# Altium PCB PCB1.PcbDoc (part 2 of 2)
Units mil, origin at the board's own origin, x right, y up, seen from the top; angles counter-clockwise.
Board outline 1500 x 1500 mil, 2 copper layers (Top Layer, Bottom Layer); 49 components, 35 nets, 276 pads, 49 vias.
Unrouted connection lines stored in the file: 2.
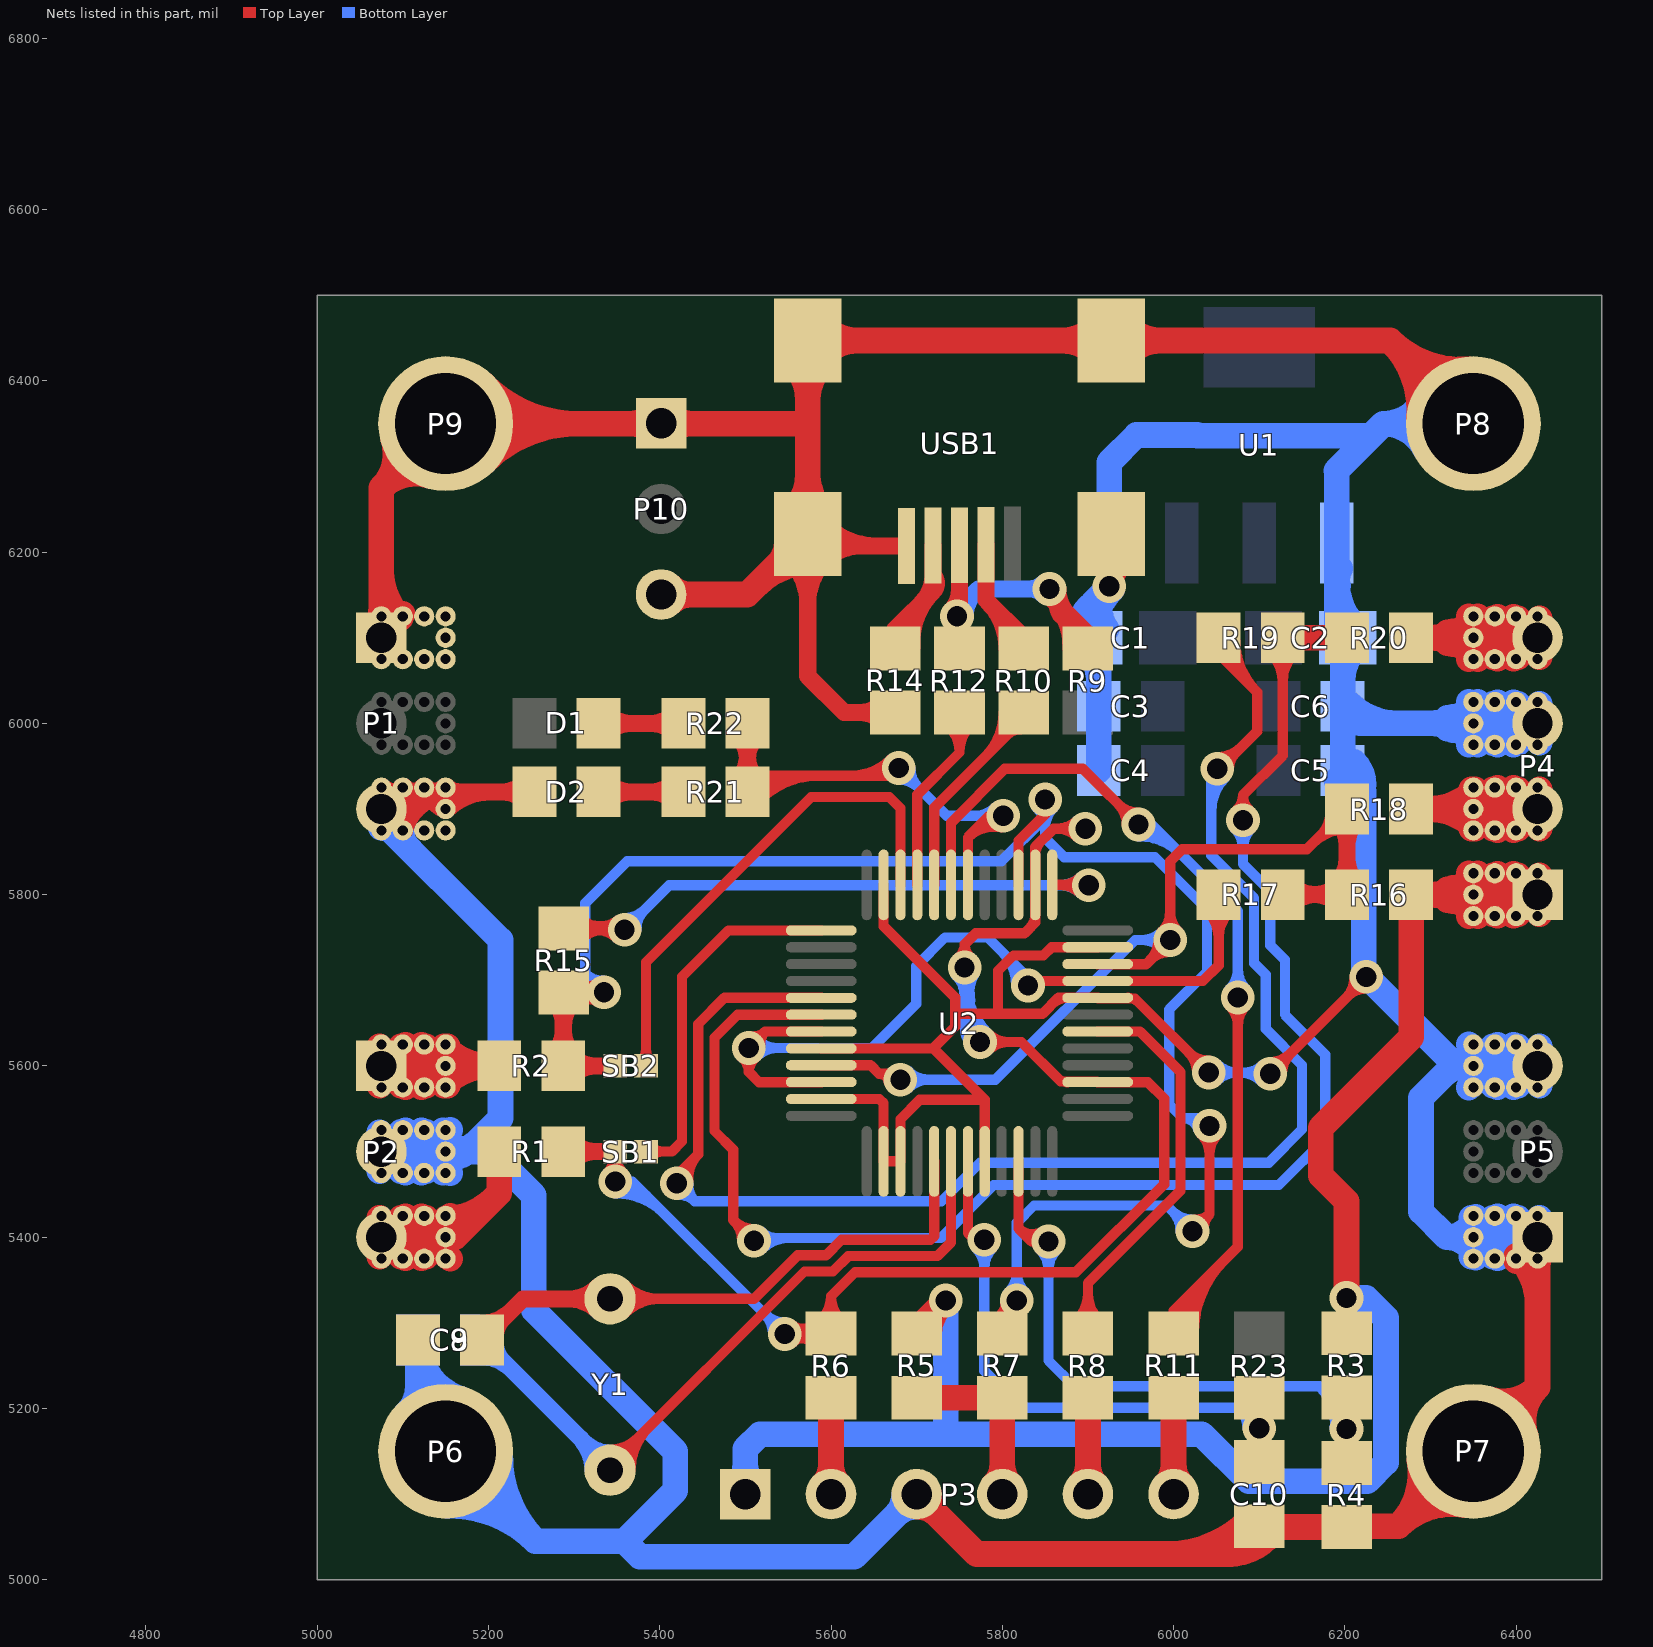
[diagram p2: the nets of this part, all layers, seen from the top]

## Via types
v1: diameter 39.37, hole 23.62, Top Layer to Bottom Layer, tented both sides, 47 vias
v2: diameter 47.24, hole 39.37, Top Layer to Bottom Layer, tented both sides, 2 vias

## Nets (pads, with @x,y where several pads share a name; then routed paths per layer and width w, separated by ;. In a path a pad name is that pad's centre, name@x,y a point inside that pad or via, vN(x,y) a via of type N, cw(c..) or ccw(c..) an arc to the next point about the centre after c; other vN are vias at no path point) (continued)
GND: C1.2 C2.2 C3.1 C4.1 C5.1 C6.1 C8.2 C9.2 C10.2 D2.2 P1.1 P1.3 P2.2 P3.3 P4.3 P5.1 P5.3 P6.1 P7.1 P8.1 P9.1 P10.1 P10.3 pad.1@5075,5475 pad.1@5075,5525 pad.1@5075,5875 pad.1@5075,5925 pad.1@5075,6075 pad.1@5075,6125 pad.1@5100,5475 pad.1@5100,5525 pad.1@5100,5875 pad.1@5100,5925 pad.1@5100,6075 pad.1@5100,6125 pad.1@5125,5475 pad.1@5125,5525 pad.1@5125,5875 pad.1@5125,5925 pad.1@5125,6075 pad.1@5125,6125 pad.1@5150,5475 pad.1@5150,5500 pad.1@5150,5525 pad.1@5150,5875 pad.1@5150,5900 pad.1@5150,5925 pad.1@5150,6075 pad.1@5150,6100 pad.1@5150,6125 pad.1@6350,5375 pad.1@6350,5400 pad.1@6350,5425 pad.1@6350,5575 pad.1@6350,5600 pad.1@6350,5625 pad.1@6350,5975 pad.1@6350,6000 pad.1@6350,6025 pad.1@6375,5375 pad.1@6375,5425 pad.1@6375,5575 pad.1@6375,5625 pad.1@6375,5975 pad.1@6375,6025 pad.1@6400,5375 pad.1@6400,5425 pad.1@6400,5575 pad.1@6400,5625 pad.1@6400,5975 pad.1@6400,6025 pad.1@6425,5375 pad.1@6425,5425 pad.1@6425,5575 pad.1@6425,5625 pad.1@6425,5975 pad.1@6425,6025 R4.2 R14.2 U1.1 U2.2 U2.3 U2.8 U2.20 U2.23 U2.35 U2.44 U2.47 USB1.5 USB1.6 USB1.7 USB1.8 USB1.9 | length 18255.1
  Top Layer w12: U2.47@5588.58,5561.42 5656.42,5561.42 5661.42,5556.42 U2.2@5661.42,5488.58 U2.3@5681.1,5488.58 5681.1,5537.88 5703.64,5560.42 5779.53,5560.42 ; U2.44@5588.58,5620.47 5719.47,5620.47 ; U2.35@5661.42,5811.42 5661.42,5763.11 5745,5679.53 5745,5661 ; U2.8@5779.53,5488.58 5779.53,5560.42 ; 5858.3,5672.29 cw(c5875.98,5654.61) U2.20@5875.98,5679.62 ; U2.23@5911.42,5738.58 5857.58,5738.58 5848,5729 5813,5729 5795,5711 5795,5661 ; U2.20@5946.85,5679.62 cw(c5946.85,5662.83) 5958.73,5674.7 ; v1@6027.31,5592.43 ccw(c5994.28,5592.43) 6017.64,5615.79 ccw(c6041,5639.15) v1@6041,5606.11 ; v1(6041,5592.43) 5954.68,5678.75 5912.2,5678.75 U2.20@5911.42,5679.53 5865.53,5679.53 5847,5661 5795,5661 ; v1(6113,5591) 6225,5703 v1(6225,5704) ; v1@6113,5604.69 ccw(c6113,5637.72) 6136.36,5614.36 ccw(c6159.72,5591) v1@6126.69,5591 ; 6200.93,5678.93 ccw(c6175.86,5704) v1@6211.31,5704 ; 6203.35,5681.35 cw(c6225,5659.69) v1@6225,5690.32 ; 5719.47,5620.47 5745,5646 5745,5661 ; 5719.47,5620.47 5779.53,5560.42 ; 5745,5661 5795,5661
  Top Layer w20: P1.3@5074.67,5900.33 cw(c5122.14,5852.86) pad.1@5122.14,5920 ; P1.3@5075,5900 5095,5920 D2.2@5253.6,5920 ; P1.3@5083.95,5905.96 ccw(c5067.59,5932.95) pad.1@5098.24,5925.43 ; P1.3@5088.81,5886.19 cw(c5170.43,5804.57) 5170.43,5920 ; pad.1@5097.34,5920 cw(c5097.34,5847.34) pad.1@5148.72,5898.72 ; P1.3@5099.84,5893 ccw(c5072.4,5937.45) pad.1@5123.24,5925.42 ; pad.1@5101.28,5926.28 ccw(c5116.44,5941.44) pad.1@5116.44,5920 ; pad.1@5101.57,5925.91 ccw(c5121.67,5937.51) 5115.66,5915.09 ; pad.1@5101.75,5874.53 cw(c5156.39,5859.89) 5128.11,5908.88 ; pad.1@5108.56,5920 ccw(c5108.56,5941.44) pad.1@5123.72,5926.28 ; 5112.3,5917.36 ccw(c5107.55,5935.07) pad.1@5123.43,5925.91 ; pad.1@5126.28,5926.28 ccw(c5141.44,5941.44) pad.1@5141.44,5920 ; pad.1@5126.76,5925.41 ccw(c5163.53,5933.97) pad.1@5143.58,5901.92 ; pad.1@5133.56,5920 ccw(c5133.56,5941.44) pad.1@5148.72,5926.28 ; 5136.06,5910.92 ccw(c5124.51,5932.97) pad.1@5148.27,5925.54 ; pad.1@5151.28,5898.72 cw(c5202.66,5847.34) 5202.66,5920 ; pad.1@5151.32,5926.24 ccw(c5166.41,5940.46) 5168.27,5919.81 ; pad.1@5151.28,5926.28 ccw(c5166.44,5941.44) 5166.44,5920 ; D2.2@5242.57,5908.98 ccw(c5215.96,5882.36) 5215.96,5920 ccw(c5215.96,5957.64) D2.2@5242.57,5931.02 ; USB1.6@5552.07,6190.39 cw(c5501.93,6140.25) 5572.83,6140.25 cw(c5643.74,6140.25) 5593.6,6190.39 cw(c5633.7,6150.29) 5633.7,6207 ; USB1.6@5572.83,6221 5572.83,6055.17 5615.4,6012.6 R14.2@5675,6012.6 ; USB1.6@5586.83,6207 USB1.5@5688,6207 ; USB1.6@5593.6,6231.93 ccw(c5653.78,6292.1) 5653.78,6207 ; R14.2@5660.04,6001.57 ccw(c5633.42,5974.96) 5633.42,6012.6 ccw(c5633.42,6050.24) R14.2@5660.04,6023.62 ; pad.1@5076.28,5926.28 ccw(c5091.44,5941.44) 5091.44,5920 cw(c5091.44,5941.44) pad.1@5076.28,5926.28
  Top Layer w30: P1.1@5064.73,6110.27 ccw(c5039.93,6135.07) 5075,6135.07 ccw(c5110.07,6135.07) P1.1@5085.27,6110.27 ; P1.1@5075,6089.65 cw(c5117.75,6089.65) pad.1@5098.57,6127.85 ; 5075,6177.66 ccw(c5152.66,6177.66) pad.1@5097.75,6122.75 ; P9.1@5089.05,6331.35 cw(c5035.14,6314.86) 5075,6275 ; pad.1@5099.57,6128.16 ccw(c5103.42,6100) P1.1@5075,6100 pad.1@5075,6125 5075,6275 ; P9.1@5131.35,6289.05 ccw(c5114.86,6235.14) 5075,6275 ; P9.1@5173.86,6326.14 cw(c5231.46,6268.54) 5231.46,6350 cw(c5231.46,6431.46) P9.1@5173.86,6373.86 ; P9.1@5195.07,6304.93 cw(c5303.88,6196.12) 5303.88,6350 cw(c5303.88,6503.88) P9.1@5195.07,6395.07 ; 5365.55,6350 ccw(c5365.55,6386.42) P10.1@5391.3,6360.67 ; 5367.45,6350 cw(c5367.45,6316.27) P10.1@5391.3,6340.12 ; P10.3@5401.57,6150.39 5502.23,6150.39 USB1.6@5572.83,6221 5573,6221.17 5573,6350 ; P10.3@5411.85,6140.12 cw(c5436.65,6115.32) 5436.65,6150.39 cw(c5436.65,6185.47) P10.3@5411.85,6160.67 ; P10.1@5411.85,6340.12 cw(c5435.7,6316.27) 5435.7,6350 ; P10.1@5411.85,6360.67 ccw(c5437.6,6386.42) 5437.6,6350 ; 5514.43,6162.6 cw(c5572.83,6104.19) USB1.6@5572.83,6186.79 ; USB1.6@5538.19,6186.36 ccw(c5513.39,6211.16) USB1.6@5548.46,6211.16 ; USB1.6@5555.6,6248.07 ccw(c5513.6,6290.08) 5573,6290.08 ; USB1.7@5555.77,6419.93 cw(c5514.17,6378.32) 5573,6378.32 cw(c5631.83,6378.32) USB1.7@5590.23,6419.93 ; 5573,6289.28 ccw(c5631.27,6289.28) USB1.6@5590.07,6248.07 ; USB1.7@5590.23,6429.77 cw(c5631.83,6388.17) 5631.83,6447 cw(c5631.83,6505.83) USB1.7@5590.23,6464.23 ; P3.3@5700,5085.47 cw(c5700,5050.4) 5724.8,5075.2 cw(c5749.6,5100) P3.3@5714.53,5100 ; P3.3@5700,5100 5770,5030 6067.4,5030 C10.2@6100,5062.6 6101,5061.6 R4.2@6202,5061.6 6203,5062.6 6262.6,5062.6 ; USB1.8@5910.1,6429.77 ccw(c5868.5,6388.17) 5868.5,6447 ccw(c5868.5,6505.83) USB1.8@5910.1,6464.23 ; USB1.9@5912.46,6191.72 cw(c5890.11,6162.17) v1@5927.17,6162.17 ; v1(5925,6160) v1@5927.17,6162.17 ; USB1.9@5927.33,6221.17 USB1.9@5927.17,6221 v1@5927.17,6162.17 ; USB1.9@5941.87,6191.72 ccw(c5964.22,6162.17) v1@5927.17,6162.17 ; USB1.8@5944.56,6429.77 cw(c5986.17,6388.17) 5986.17,6447 cw(c5986.17,6505.83) USB1.8@5944.56,6464.23 ; 5991.8,5030 ccw(c5991.8,5166.87) C10.2@6088.57,5070.09 ; 6064.22,5030 ccw(c6064.22,5094.44) C10.2@6109.79,5048.87 ; C10.2@6075.2,5037.8 ccw(c6050.4,5062.6) C10.2@6085.47,5062.6 ; C10.2@6111.43,5070.09 ccw(c6131.92,5090.58) 6131.92,5061.6 ; R4.2@6213.43,5054.11 cw(c6233.92,5033.62) 6233.92,5062.6 ; P8.1@6286.49,6355.38 ccw(c6171.17,6365.16) 6253,6447 ; P7.1@6287.15,5139.41 cw(c6200.4,5124.8) 6262.6,5062.6 ; P7.1@6339.41,5087.15 ccw(c6324.8,5000.4) 6262.6,5062.6 ; P8.1@6344.62,6413.51 cw(c6334.84,6528.83) 6253,6447 ; P8.1@6350,6350 6253,6447 ; P7.1@6368.65,5210.95 ccw(c6385.14,5264.86) 6425,5225 ; pad.1@6400.43,5371.84 ccw(c6396.58,5400) P5.1@6425,5400 pad.1@6425,5375 6425,5225 ; pad.1@6400.43,5378.16 cw(c6396.58,5350) 6425,5350 ; pad.1@6402.25,5377.25 cw(c6347.34,5322.34) 6425,5322.34 ; P7.1@6410.95,5168.65 cw(c6464.86,5185.14) 6425,5225 ; P5.1@6414.73,5389.73 cw(c6389.93,5364.93) 6425,5364.93 cw(c6460.07,5364.93) P5.1@6435.27,5389.73 ; 5075,6275 P9.1@5150,6350 5573,6350 ; 5573,6350 USB1.7@5573,6447 USB1.8@5927.33,6447 6253,6447 ; 6262.6,5062.6 P7.1@6350,5150 6425,5225
  Bottom Layer w12: v1(6041,5592.43) 6101.57,5592.43 6103,5591 v1(6113,5591) ; v1@6050.68,5582.75 cw(c6074.04,5559.39) 6074.04,5592.43 cw(c6074.04,5625.47) v1@6050.68,5602.11 ; 6076.51,5592.43 cw(c6076.51,5554.51) v1@6103.32,5581.32 ; 6083.41,5592.43 ccw(c6083.41,5620.59) v1@6103.32,5600.68
  Bottom Layer w30: pad.1@5072.75,5477.25 cw(c5127.66,5422.34) 5127.66,5500 cw(c5127.66,5577.66) pad.1@5072.75,5522.75 ; pad.1@5074.17,5878.08 cw(c5078.48,5862) P1.3@5086.81,5876.42 ; pad.1@5075,5878.19 cw(c5075,5859.33) 5088.33,5872.67 ; P1.3@5075,5900 5075,5886 5214,5747 5214,5539 5175,5500 ; pad.1@5081.54,5879.46 ccw(c5100,5897.91) pad.1@5100,5871.81 ; P2.2@5085.27,5489.73 cw(c5110.07,5464.93) 5110.07,5500 cw(c5110.07,5535.07) P2.2@5085.27,5510.27 ; P1.3@5089.53,5900 ccw(c5158.4,5900) 5109.7,5851.3 ; pad.1@5096.81,5875 ccw(c5122.91,5875) 5104.46,5856.54 ; pad.1@5097.66,5477.17 cw(c5150,5428.6) pad.1@5150,5500 ; pad.1@5097.66,5522.83 ccw(c5150,5571.4) pad.1@5150,5500 ; pad.1@5103.16,5475.43 ccw(c5075,5471.58) P2.2@5075,5500 ; pad.1@5103.16,5524.57 cw(c5075,5528.42) P2.2@5075,5500 ; P6.1@5104.93,5195.07 ccw(c5074.34,5225.66) 5117.6,5225.66 ; C9.2@5112.3,5266.89 cw(c5097.78,5241.74) 5125.84,5249.26 ; 5117.6,5239.43 ccw(c5177.39,5239.43) P6.1@5159.88,5182.26 ; 5119.87,5493.57 ccw(c5131.31,5533.63) pad.1@5151.55,5497.21 ; 5119.87,5506.43 cw(c5131.31,5466.37) pad.1@5151.55,5502.79 ; pad.1@5121.84,5475.43 cw(c5150,5471.58) pad.1@5150,5500 ; pad.1@5121.84,5524.57 ccw(c5150,5528.42) pad.1@5150,5500 ; pad.1@5127.34,5477.17 ccw(c5075,5428.6) P2.2@5075,5500 ; pad.1@5127.34,5522.83 cw(c5075,5571.4) P2.2@5075,5500 ; pad.1@5146.84,5475.43 cw(c5175,5471.58) 5175,5500 ; pad.1@5146.84,5524.57 ccw(c5175,5528.42) 5175,5500 ; pad.1@5146.94,5499.12 cw(c5170.5,5505.92) pad.1@5155.25,5525.12 ; pad.1@5146.94,5500.88 ccw(c5170.5,5494.08) pad.1@5155.25,5474.88 ; pad.1@5148.23,5497.35 ccw(c5160,5515) 5175,5500 ; pad.1@5148.67,5497.1 ccw(c5157.87,5517.08) 5165.56,5496.48 ; pad.1@5148.67,5502.9 cw(c5157.87,5482.92) 5165.56,5503.52 ; pad.1@5150,5496.81 ccw(c5150,5549.47) 5187.23,5512.23 ; pad.1@5151.26,5483.6 ccw(c5131.26,5494.42) pad.1@5153.06,5500.91 ; pad.1@5151.26,5516.4 cw(c5131.26,5505.58) pad.1@5153.06,5499.09 ; P6.1@5151.63,5086.28 cw(c5155.24,4945.25) 5254.99,5045.01 ; pad.1@5152.25,5477.25 ccw(c5097.34,5422.34) 5097.34,5500 ccw(c5097.34,5577.66) pad.1@5152.25,5522.75 ; P6.1@5168.67,5210.95 cw(c5189.82,5280) C9.2@5117.6,5280 5117.6,5182.4 P6.1@5150,5150 5255,5045 ; P6.1@5213.72,5148.37 ccw(c5354.75,5144.76) 5254.99,5045.01 ; P3.3@5685.47,5100 cw(c5650.4,5100) 5675.2,5075.2 cw(c5700,5050.4) P3.3@5700,5085.47 ; P3.3@5700,5100 5627,5027 5377,5027 5359,5045 ; C1.2@5895.03,6111.66 ccw(c5866.87,6139.82) 5906.69,6139.82 ccw(c5946.52,6139.82) C1.2@5918.36,6111.66 ; C1.2@5897,6088.34 cw(c5859.33,6050.67) 5912.6,6050.67 ; C1.2@5897.95,6091.77 cw(c5924.49,6112.16) 5900.83,6135.83 ; C1.2@5906.69,6104.49 cw(c5980.51,6104.49) v1@5928.31,6156.69 ; C4.1@5912.6,5945 C3.1@5912.6,6020 5912.6,6094.09 C1.2@5906.69,6100 5906.69,6141.69 v1(5925,6160) ; C1.2@5921.74,6110.05 cw(c5951.83,6133.17) v1(5925,6160) ; C5.1@6189.91,5933.57 cw(c6112.45,5856.11) 6222,5856.11 ; U1.1@6190.55,6165.87 ccw(c6267.21,6165.87) C2.2@6213,6111.66 ; 6191.94,6160.68 cw(c6217.72,6167.58) U1.1@6194.61,6180.93 ; 6197.4,6050.67 cw(c6250.67,6050.67) C2.2@6213,6088.34 ; C6.1@6204.89,6023.55 ccw(c6261.75,6080.41) 6261.75,6000 ; C5.1@6211.13,5954.79 cw(c6184.87,5928.54) C5.1@6222,5928.54 ; P8.1@6293.45,6320.59 ccw(c6245.01,6295.39) 6245.01,6350 ; P8.1@6293.45,6379.41 cw(c6245.01,6404.61) 6245.01,6350 ; 6314.47,5588.47 cw(c6350,5552.95) pad.1@6350,5603.19 ; 6319.87,5993.57 ccw(c6331.31,6033.63) pad.1@6351.55,5997.21 ; 6319.87,6006.43 cw(c6331.31,5966.37) pad.1@6351.55,6002.79 ; 6321.3,5608.7 ccw(c6350,5637.4) pad.1@6350,5596.81 ; pad.1@6344.75,5574.88 ccw(c6329.5,5594.08) pad.1@6353.06,5600.88 ; pad.1@6344.75,5625.12 cw(c6329.5,5605.92) pad.1@6353.06,5599.12 ; pad.1@6344.75,5974.88 ccw(c6329.5,5994.08) pad.1@6353.06,6000.88 ; pad.1@6344.75,6025.12 cw(c6329.5,6005.92) pad.1@6353.06,5999.12 ; pad.1@6346.94,5999.12 cw(c6370.5,6005.92) pad.1@6355.25,6025.12 ; pad.1@6346.94,6000.88 ccw(c6370.5,5994.08) pad.1@6355.25,5974.88 ; pad.1@6347.75,5377.25 cw(c6402.66,5322.34) 6402.66,5400 cw(c6402.66,5477.66) pad.1@6347.75,5422.75 ; pad.1@6347.75,5577.25 cw(c6402.66,5522.34) 6402.66,5600 cw(c6402.66,5677.66) pad.1@6347.75,5622.75 ; pad.1@6347.75,5977.25 cw(c6402.66,5922.34) 6402.66,6000 cw(c6402.66,6077.66) pad.1@6347.75,6022.75 ; pad.1@6348.45,5597.21 ccw(c6368.69,5633.63) 6380.13,5593.57 ; pad.1@6348.45,5602.79 cw(c6368.69,5566.37) 6380.13,5606.43 ; pad.1@6348.45,5997.21 ccw(c6368.69,6033.63) 6380.13,5993.57 ; pad.1@6348.45,6002.79 cw(c6368.69,5966.37) 6380.13,6006.43 ; P8.1@6350,6350 6245,6350 ; pad.1@6351.13,5597.02 cw(c6343.42,5617.42) 6328,5602 ; pad.1@6352.2,5602.31 ccw(c6340.26,5589.74) 6328,5602 ; pad.1@6352.25,5977.25 ccw(c6297.34,5922.34) 6297.34,6000 ccw(c6297.34,6077.66) pad.1@6352.25,6022.75 ; pad.1@6353,5376.08 ccw(c6319,5363.88) 6319,5400 ; pad.1@6353,5423.92 cw(c6319,5436.12) 6319,5400 ; pad.1@6372.66,5377.17 cw(c6425,5328.6) P5.1@6425,5400 ; pad.1@6372.66,5422.83 ccw(c6425,5471.4) P5.1@6425,5400 ; pad.1@6372.66,5577.17 cw(c6425,5528.6) P5.3@6425,5600 ; pad.1@6372.66,5622.83 ccw(c6425,5671.4) P5.3@6425,5600 ; pad.1@6372.66,5977.17 cw(c6425,5928.6) P4.3@6425,6000 ; pad.1@6372.66,6022.83 ccw(c6425,6071.4) P4.3@6425,6000 ; pad.1@6378.16,5375.43 ccw(c6350,5371.58) pad.1@6350,5400 ; pad.1@6378.16,5424.57 cw(c6350,5428.42) pad.1@6350,5400 ; pad.1@6378.16,5575.43 ccw(c6350,5571.58) pad.1@6350,5600 ; pad.1@6378.16,5624.57 cw(c6350,5628.42) pad.1@6350,5600 ; pad.1@6378.16,5975.43 ccw(c6350,5971.58) pad.1@6350,6000 ; pad.1@6378.16,6024.57 cw(c6350,6028.42) pad.1@6350,6000 ; pad.1@6396.84,5375.43 cw(c6425,5371.58) P5.1@6425,5400 ; pad.1@6396.84,5424.57 ccw(c6425,5428.42) P5.1@6425,5400 ; pad.1@6396.84,5575.43 cw(c6425,5571.58) P5.3@6425,5600 ; pad.1@6396.84,5624.57 ccw(c6425,5628.42) P5.3@6425,5600 ; pad.1@6396.84,5975.43 cw(c6425,5971.58) P4.3@6425,6000 ; pad.1@6396.84,6024.57 ccw(c6425,6028.42) P4.3@6425,6000 ; pad.1@6402.34,5377.17 ccw(c6350,5328.6) pad.1@6350,5400 ; pad.1@6402.34,5422.83 cw(c6350,5471.4) pad.1@6350,5400 ; pad.1@6402.34,5577.17 ccw(c6350,5528.6) pad.1@6350,5600 ; pad.1@6402.34,5622.83 cw(c6350,5671.4) pad.1@6350,5600 ; pad.1@6402.34,5977.17 ccw(c6350,5928.6) pad.1@6350,6000 ; pad.1@6402.34,6022.83 cw(c6350,6071.4) pad.1@6350,6000 ; P5.1@6414.73,5389.73 ccw(c6389.93,5364.93) 6389.93,5400 ccw(c6389.93,5435.07) P5.1@6414.73,5410.27 ; P5.3@6414.73,5589.73 ccw(c6389.93,5564.93) 6389.93,5600 ccw(c6389.93,5635.07) P5.3@6414.73,5610.27 ; P4.3@6414.73,5989.73 ccw(c6389.93,5964.93) 6389.93,6000 ccw(c6389.93,6035.07) P4.3@6414.73,6010.27 ; pad.1@6427.25,5377.25 ccw(c6372.34,5322.34) 6372.34,5400 ccw(c6372.34,5477.66) pad.1@6427.25,5422.75 ; pad.1@6427.25,5577.25 ccw(c6372.34,5522.34) 6372.34,5600 ccw(c6372.34,5677.66) pad.1@6427.25,5622.75 ; pad.1@6427.25,5977.25 ccw(c6372.34,5922.34) 6372.34,6000 ccw(c6372.34,6077.66) pad.1@6427.25,6022.75 ; P2.2@5075,5500 pad.1@5150,5500 ; pad.1@5150,5500 5175,5500 ; 5175,5500 5202,5500 5253,5449 5253,5315 5418,5150 5418,5104 5359,5045 ; 5255,5045 5359,5045 ; v1(5925,6160) 5925,6305 5956.69,6336.69 6027.27,6336.69 6027.95,6336 6231,6336 6245,6350 ; C6.1@6197.4,6020 C5.1@6197.4,5945 6222,5920.4 6222,5708 6328,5602 ; C6.1@6197.4,6020 6197.4,6094.09 6190.55,6100.94 U1.1@6190.55,6210.83 6190.55,6294.45 6190,6295 6245,6350 ; C6.1@6197.4,6020 6217.4,6000 pad.1@6350,6000 ; 6319,5400 6289,5430 6289,5563 6328,5602 ; 6319,5400 pad.1@6350,5400 ; pad.1@6350,5400 P5.1@6425,5400 ; pad.1@6350,5600 P5.3@6425,5600 ; pad.1@6350,6000 P4.3@6425,6000
"LED STLINK": R21.2 R22.2 U2.30 | length 1053.2
  Top Layer w12: R21.2@5499.28,5927.05 cw(c5528.12,5898.22) 5528.12,5939 ; R21.2@5502.4,5920 5521.4,5939 5666,5939 5675,5948 v1(5679,5948) ; R21.2@5507.77,5918.57 cw(c5557.09,5869.25) 5557.09,5939 ; R21.2@5516.25,5910.08 cw(c5586.06,5840.28) 5586.06,5939 ; 5624.23,5939 ccw(c5624.23,6002.77) v1@5669.32,5957.68 ; 5653.2,5939 ccw(c5653.2,5973.8) v1@5677.81,5949.19 ; U2.30@5759.84,5811.42 5759.84,5866.84 ; 5775.76,5882.76 cw(c5795.33,5863.19) v1@5800.67,5890.35 ; v1@5798.36,5878.57 ccw(c5790.1,5836.59) 5759.84,5866.84 ; v1(5801,5892) 5785,5892 5759.84,5866.84
  Top Layer w20: R21.2@5491.38,5934.96 ccw(c5464.76,5961.58) 5502.4,5961.58 ccw(c5540.04,5961.58) R21.2@5513.43,5934.96 ; R22.2@5491.38,5985.04 cw(c5464.76,5958.42) 5502.4,5958.42 cw(c5540.04,5958.42) R22.2@5513.43,5985.04 ; R21.2@5502.4,5920 R22.2@5502.4,6000
  Bottom Layer w12: v1@5679,5934.31 cw(c5679,5901.28) 5702.36,5924.64 cw(c5725.72,5948) v1@5692.69,5948 ; v1(5679,5948) 5735,5892 v1(5801,5892) ; v1@5791.32,5882.32 ccw(c5767.96,5858.96) 5767.96,5892 ccw(c5767.96,5925.04) v1@5791.32,5901.68
NetC8_1: C8.1 U2.5 Y1.1 | length 891.6
  Top Layer w12: Y1.1@5342,5328 5510.13,5328 5561.13,5379 5594.26,5379 5612.26,5397 5716.13,5397 5720.47,5401.34 U2.5@5720.47,5488.58 ; Y1.1@5358.97,5311.03 cw(c5399.94,5270.06) 5399.94,5328 cw(c5399.94,5385.94) Y1.1@5358.97,5344.97
  Top Layer w20: C8.1@5192.4,5280 5240.4,5328 Y1.1@5342,5328 ; C8.1@5192.4,5299.53 ccw(c5192.4,5346.67) 5225.74,5313.34 ; C8.1@5207.99,5283.94 cw(c5236.13,5283.94) C8.1@5216.23,5303.83 ; Y1.1@5327.86,5313.86 ccw(c5293.72,5279.72) 5293.72,5328 ccw(c5293.72,5376.28) Y1.1@5327.86,5342.14
NetC9_1: C9.1 U2.6 Y1.2 | length 1077.9
  Top Layer w12: Y1.2@5342,5128 5342,5133 5569,5360 5602.13,5360 5620.13,5378 5724,5378 5740.16,5394.16 U2.6@5740.16,5488.58 ; Y1.2@5342,5152 ccw(c5342,5197.87) 5374.44,5165.44 ; Y1.2@5354,5128 cw(c5395.04,5128) 5366.02,5157.02 ; Y1.2@5366,5128 cw(c5436.01,5128) 5386.51,5177.51
  Bottom Layer w20: C9.1@5192.4,5260.47 cw(c5192.4,5213.33) 5225.74,5246.66 ; C9.1@5192.4,5280 5342,5130.4 Y1.2@5342,5128 ; C9.1@5207.99,5276.06 ccw(c5236.13,5276.06) C9.1@5216.23,5256.17 ; 5306.16,5166.24 cw(c5267.92,5128) Y1.2@5322,5128 ; 5311.96,5160.44 ccw(c5342,5190.49) Y1.2@5342,5148
NetC10_1: C10.1 R23.2 U2.7 | length 711.5
  Top Layer w12: U2.7@5759.84,5488.58 5759.84,5405.16 5768,5397 v1(5779,5397)
  Bottom Layer w12: v1@5769.32,5387.32 cw(c5745.96,5363.96) 5779,5363.96 cw(c5812.04,5363.96) v1@5788.68,5387.32 ; v1(5779,5397) 5779,5244 5822,5201 6076,5201 v1(6100,5177) ; v1@6086.31,5177 ccw(c6053.28,5177) 6076.64,5200.36 ccw(c6100,5223.72) v1@6100,5190.69
NetD1_2: D1.2 R22.1 | length 217.4
  Top Layer w20: D1.2@5328.4,6000 R22.1@5427.6,6000 ; D1.2@5339.43,5988.98 cw(c5366.04,5962.36) 5366.04,6000 cw(c5366.04,6037.64) D1.2@5339.43,6011.02 ; R22.1@5416.57,5988.98 ccw(c5389.96,5962.36) 5389.96,6000 ccw(c5389.96,6037.64) R22.1@5416.57,6011.02
NetD2_1: D2.1 R21.1 | length 217.4
  Top Layer w20: D2.1@5328.4,5920 R21.1@5427.6,5920 ; D2.1@5339.43,5908.98 cw(c5366.04,5882.36) 5366.04,5920 cw(c5366.04,5957.64) D2.1@5339.43,5931.02 ; R21.1@5416.57,5908.98 ccw(c5389.96,5882.36) 5389.96,5920 ccw(c5389.96,5957.64) R21.1@5416.57,5931.02
NetP2_1: P2.1 pad.1@5075,5575 pad.1@5075,5625 pad.1@5100,5575 pad.1@5100,5625 pad.1@5125,5575 pad.1@5125,5625 pad.1@5150,5575 pad.1@5150,5600 pad.1@5150,5625 R2.1 | length 956.7
  Top Layer w30: pad.1@5072.75,5577.25 cw(c5127.66,5522.34) 5127.66,5600 cw(c5127.66,5677.66) pad.1@5072.75,5622.75 ; P2.1@5085.27,5589.73 cw(c5110.07,5564.93) 5110.07,5600 cw(c5110.07,5635.07) P2.1@5085.27,5610.27 ; pad.1@5097.66,5577.17 cw(c5150,5528.6) pad.1@5150,5600 ; pad.1@5097.66,5622.83 ccw(c5150,5671.4) pad.1@5150,5600 ; pad.1@5103.16,5575.43 ccw(c5075,5571.58) P2.1@5075,5600 ; pad.1@5103.16,5624.57 cw(c5075,5628.42) P2.1@5075,5600 ; pad.1@5121.84,5575.43 cw(c5150,5571.58) pad.1@5150,5600 ; pad.1@5121.84,5624.57 ccw(c5150,5628.42) pad.1@5150,5600 ; pad.1@5127.34,5577.17 ccw(c5075,5528.6) P2.1@5075,5600 ; pad.1@5127.34,5622.83 cw(c5075,5671.4) P2.1@5075,5600 ; pad.1@5147.75,5577.25 cw(c5202.66,5522.34) 5202.66,5600 cw(c5202.66,5677.66) pad.1@5147.75,5622.75 ; pad.1@5152.25,5577.25 ccw(c5097.34,5522.34) 5097.34,5600 ccw(c5097.34,5677.66) pad.1@5152.25,5622.75 ; R2.1@5212.6,5600 pad.1@5150,5600 ; P2.1@5075,5600 pad.1@5150,5600
NetP2_3: P2.3 pad.1@5075,5375 pad.1@5075,5425 pad.1@5100,5375 pad.1@5100,5425 pad.1@5125,5375 pad.1@5125,5425 pad.1@5150,5375 pad.1@5150,5400 pad.1@5150,5425 R1.1 | length 1104.9
  Top Layer w30: pad.1@5072.75,5377.25 cw(c5127.66,5322.34) 5127.66,5400 cw(c5127.66,5477.66) pad.1@5072.75,5422.75 ; P2.3@5085.27,5389.73 cw(c5110.07,5364.93) 5110.07,5400 cw(c5110.07,5435.07) P2.3@5085.27,5410.27 ; pad.1@5097.66,5377.17 cw(c5150,5328.6) pad.1@5150,5400 ; pad.1@5097.66,5422.83 ccw(c5150,5471.4) pad.1@5150,5400 ; pad.1@5103.16,5375.43 ccw(c5075,5371.58) P2.3@5075,5400 ; pad.1@5103.16,5424.57 cw(c5075,5428.42) P2.3@5075,5400 ; 5119.87,5393.57 ccw(c5131.31,5433.63) pad.1@5151.55,5397.21 ; 5119.87,5406.43 cw(c5131.31,5366.37) pad.1@5151.55,5402.79 ; pad.1@5121.84,5375.43 cw(c5150,5371.58) pad.1@5150,5400 ; pad.1@5121.84,5424.57 ccw(c5150,5428.42) pad.1@5150,5400 ; pad.1@5127.34,5377.17 ccw(c5075,5328.6) P2.3@5075,5400 ; pad.1@5127.34,5422.83 cw(c5075,5471.4) P2.3@5075,5400 ; pad.1@5146.94,5399.12 cw(c5170.5,5405.92) pad.1@5155.25,5425.12 ; pad.1@5146.94,5400.88 ccw(c5170.5,5394.08) pad.1@5155.25,5374.88 ; pad.1@5150,5396.81 ccw(c5150,5415.67) 5163.33,5402.33 ; pad.1@5150,5421.81 ccw(c5150,5501.02) 5206.01,5445.01 ; pad.1@5152.25,5377.25 ccw(c5097.34,5322.34) 5097.34,5400 ccw(c5097.34,5477.66) pad.1@5152.25,5422.75 ; R1.1@5212.6,5500 5212.6,5451.6 5161,5400 pad.1@5150,5400 ; P2.3@5075,5400 pad.1@5150,5400
NetP3_2: P3.2 R6.1 | length 167.7
  Top Layer w30: P3.2@5589.73,5110.27 ccw(c5564.93,5135.07) 5600,5135.07 ccw(c5635.07,5135.07) P3.2@5610.27,5110.27 ; P3.2@5600,5100 R6.1@5600,5212.6
NetP3_4: P3.4 R5.1 R7.1 | length 267.7
  Top Layer w30: R5.1@5700,5212.6 R7.1@5800,5212.6 P3.4@5800,5100 ; P3.4@5789.73,5110.27 ccw(c5764.93,5135.07) 5800,5135.07 ccw(c5835.07,5135.07) P3.4@5810.27,5110.27
NetP3_5: P3.5 R8.1 | length 167.7
  Top Layer w30: P3.5@5889.73,5110.27 ccw(c5864.93,5135.07) 5900,5135.07 ccw(c5935.07,5135.07) P3.5@5910.27,5110.27 ; P3.5@5900,5100 R8.1@5900,5212.6
NetP3_6: P3.6 R11.1 | length 167.7
  Top Layer w30: P3.6@5989.73,5110.27 ccw(c5964.93,5135.07) 6000,5135.07 ccw(c6035.07,5135.07) P3.6@6010.27,5110.27 ; P3.6@6000,5100 R11.1@6000,5212.6
NetP4_2: P4.2 pad.1@6350,5875 pad.1@6350,5900 pad.1@6350,5925 pad.1@6375,5875 pad.1@6375,5925 pad.1@6400,5875 pad.1@6400,5925 pad.1@6425,5875 pad.1@6425,5925 R18.2 | length 966.7
  Top Layer w30: R18.2@6277.4,5900 pad.1@6350,5900 ; pad.1@6347.75,5877.25 cw(c6402.66,5822.34) 6402.66,5900 cw(c6402.66,5977.66) pad.1@6347.75,5922.75 ; pad.1@6352.25,5877.25 ccw(c6297.34,5822.34) 6297.34,5900 ccw(c6297.34,5977.66) pad.1@6352.25,5922.75 ; pad.1@6372.66,5877.17 cw(c6425,5828.6) P4.2@6425,5900 ; pad.1@6372.66,5922.83 ccw(c6425,5971.4) P4.2@6425,5900 ; pad.1@6378.16,5875.43 ccw(c6350,5871.58) pad.1@6350,5900 ; pad.1@6378.16,5924.57 cw(c6350,5928.42) pad.1@6350,5900 ; pad.1@6396.84,5875.43 cw(c6425,5871.58) P4.2@6425,5900 ; pad.1@6396.84,5924.57 ccw(c6425,5928.42) P4.2@6425,5900 ; pad.1@6402.34,5877.17 ccw(c6350,5828.6) pad.1@6350,5900 ; pad.1@6402.34,5922.83 cw(c6350,5971.4) pad.1@6350,5900 ; P4.2@6414.73,5889.73 ccw(c6389.93,5864.93) 6389.93,5900 ccw(c6389.93,5935.07) P4.2@6414.73,5910.27 ; pad.1@6427.25,5877.25 ccw(c6372.34,5822.34) 6372.34,5900 ccw(c6372.34,5977.66) pad.1@6427.25,5922.75 ; pad.1@6350,5900 P4.2@6425,5900
NetP4_4: P4.4 pad.1@6350,6075 pad.1@6350,6100 pad.1@6350,6125 pad.1@6375,6075 pad.1@6375,6125 pad.1@6400,6075 pad.1@6400,6125 pad.1@6425,6075 pad.1@6425,6125 R20.2 | length 1213.4
  Top Layer w30: R20.2@6277.4,6100 pad.1@6350,6100 ; 6319.87,6093.57 ccw(c6331.31,6133.63) pad.1@6351.55,6097.21 ; 6319.87,6106.43 cw(c6331.31,6066.37) pad.1@6351.55,6102.79 ; pad.1@6344.75,6074.88 ccw(c6329.5,6094.08) pad.1@6353.06,6100.88 ; pad.1@6344.75,6125.12 cw(c6329.5,6105.92) pad.1@6353.06,6099.12 ; pad.1@6346.94,6099.12 cw(c6370.5,6105.92) pad.1@6355.25,6125.12 ; pad.1@6346.94,6100.88 ccw(c6370.5,6094.08) pad.1@6355.25,6074.88 ; pad.1@6347.75,6077.25 cw(c6402.66,6022.34) 6402.66,6100 cw(c6402.66,6177.66) pad.1@6347.75,6122.75 ; pad.1@6348.45,6097.21 ccw(c6368.69,6133.63) 6380.13,6093.57 ; pad.1@6348.45,6102.79 cw(c6368.69,6066.37) 6380.13,6106.43 ; pad.1@6352.25,6077.25 ccw(c6297.34,6022.34) 6297.34,6100 ccw(c6297.34,6177.66) pad.1@6352.25,6122.75 ; pad.1@6372.66,6077.17 cw(c6425,6028.6) P4.4@6425,6100 ; pad.1@6372.66,6122.83 ccw(c6425,6171.4) P4.4@6425,6100 ; pad.1@6378.16,6075.43 ccw(c6350,6071.58) pad.1@6350,6100 ; pad.1@6378.16,6124.57 cw(c6350,6128.42) pad.1@6350,6100 ; pad.1@6396.84,6075.43 cw(c6425,6071.58) P4.4@6425,6100 ; pad.1@6396.84,6124.57 ccw(c6425,6128.42) P4.4@6425,6100 ; pad.1@6402.34,6077.17 ccw(c6350,6028.6) pad.1@6350,6100 ; pad.1@6402.34,6122.83 cw(c6350,6171.4) pad.1@6350,6100 ; P4.4@6414.73,6089.73 ccw(c6389.93,6064.93) 6389.93,6100 ccw(c6389.93,6135.07) P4.4@6414.73,6110.27 ; pad.1@6427.25,6077.25 ccw(c6372.34,6022.34) 6372.34,6100 ccw(c6372.34,6177.66) pad.1@6427.25,6122.75 ; pad.1@6350,6100 P4.4@6425,6100
NetR3_1: R3.1 R4.1 U2.10 | length 865.3
  Top Layer w12: U2.10@5818.9,5488.58 5818.9,5410.1 ; 5829.72,5399.28 ccw(c5843.23,5412.79) v1@5853.13,5396.44 ; v1@5841.24,5390.04 ccw(c5834,5387.23) 5834,5395 ; v1@5841.24,5399.96 cw(c5834,5402.77) 5834,5395 ; v1@5846.91,5406.71 cw(c5835.07,5426.27) 5818.9,5410.1 ; v1(5854,5395) 5834,5395 ; 5818.9,5410.1 5834,5395
  Bottom Layer w12: v1@5844.32,5385.32 cw(c5820.96,5361.96) 5854,5361.96 cw(c5887.04,5361.96) v1@5863.68,5385.32 ; v1(5854,5395) 5854,5256 5884,5226 6170,5226 ; v1@6188.35,5176.95 ccw(c6125.34,5181.34) 6170,5226 ; 6188.63,5207.37 cw(c6160.17,5178.91) v1@6200.32,5176.12 ; v1(6202,5176) 6202,5194 6170,5226
NetR9_1: R9.1 R12.1 USB1.3 | length 552.9
  Top Layer w20: v1@5740.15,6131.85 ccw(c5716.38,6155.62) 5750,6155.62 ; v1@5750,6125 USB1.3@5750,6208 ; v1(5855,6157) v1@5855,6149 ; v1@5864.35,6154.49 ccw(c5900.13,6144.91) 5868.05,6126.39 ; v1@5864.69,6157 ccw(c5907.38,6157) 5877.19,6126.81 ; R9.1@5880.47,6087.42 ccw(c5793.51,6087.51) v1@5855,6149 ; 5889.09,6114.91 cw(c5861.63,6087.44) R9.1@5900.47,6087.4 ; R9.1@5900,6087.4 5900,6104 v1@5855,6149
  Bottom Layer w20: v1(5747,6125) 5747,6132 5772,6157 v1(5855,6157) ; v1@5756.68,6125 cw(c5796.97,6125) 5768.48,6153.48 ; v1@5848.15,6150.15 ccw(c5831.62,6133.62) 5831.62,6157 ccw(c5831.62,6180.38) v1@5848.15,6163.85
NetR10_1: R10.1 USB1.2 | length 200.2
  Top Layer w20: USB1.2@5781,6208.5 5781,6144 5825,6100 R10.1@5825,6087.4 ; 5782.76,6142.24 cw(c5727.91,6087.4) R10.1@5805.47,6087.4
NetR14_1: R14.1 USB1.4 | length 307
  Top Layer w20: R14.1@5674.54,6087.1 cw(c5720.6,6090.3) 5687.95,6122.95 ; R14.1@5675,6087.4 5675,6110 5719,6154 ; R14.1@5694.49,6088.48 cw(c5778.66,6094.34) 5719,6154 ; 5705.8,6140.8 ccw(c5673.54,6173.05) USB1.4@5719.16,6173.05 ; USB1.4@5719,6207.5 5719,6154 ; USB1.4@5719.11,6173.16 cw(c5709.36,6163.64) 5719,6154
NetR15_1: R15.1 U2.25 | length 1002.9
  Top Layer w12: R15.1@5288,5760.4 5289.4,5759 v1(5359,5759) ; R15.1@5305.79,5746.55 cw(c5335.85,5716.49) 5335.85,5759 ; R15.1@5305.79,5774.25 ccw(c5342.62,5811.08) v1@5342.62,5759 ; 5323.67,5764.08 ccw(c5331.52,5793.35) v1@5350.45,5769.69 ; 5335.88,5760.81 cw(c5331.07,5742.88) v1@5347.15,5752.16 ; v1@5349.32,5749.32 ccw(c5325.96,5725.96) 5325.96,5759 ccw(c5325.96,5792.04) v1@5349.32,5768.68 ; U2.25@5858.27,5811.42 5900.58,5811.42 v1(5901,5811) ; 5866.95,5811.42 cw(c5866.95,5776.95) v1@5891.32,5801.32 ; 5868.97,5811.42 ccw(c5868.97,5843.03) v1@5891.32,5820.68
  Bottom Layer w12: v1(5359,5759) 5411,5811 v1(5901,5811) ; v1@5359,5772.69 ccw(c5359,5805.72) 5382.36,5782.36 ccw(c5405.72,5759) v1@5372.69,5759 ; v1@5891.32,5801.32 ccw(c5867.96,5777.96) 5867.96,5811 ccw(c5867.96,5844.04) v1@5891.32,5820.68
STM_JTCK: SB1.1 U2.37 | length 453.5
  Top Layer w12: SB1.1@5384,5500 5414,5500 5426,5512 5426,5704 5480.27,5758.27 U2.37@5588.58,5758.27 ; SB1.1@5389.5,5494.5 cw(c5402.78,5481.22) 5402.78,5500 cw(c5402.78,5518.78) SB1.1@5389.5,5505.5
STM_JTMS: SB2.1 U2.34 | length 622.5
  Top Layer w12: SB2.1@5378.5,5605.5 ccw(c5365.22,5618.78) 5384,5618.78 ccw(c5402.78,5618.78) SB2.1@5389.5,5605.5 ; SB2.1@5384,5600 5384,5721 5577,5914 5668,5914 5681.1,5900.9 U2.34@5681.1,5811.42
SWIM: R16.1 R17.2 R18.1 U2.22 U2.45 | length 1611.8
  Top Layer w12: U2.45@5588.58,5600.79 5646.21,5600.79 5656,5591 ; v1@5667.56,5581.44 ccw(c5656,5579.24) 5656,5591 ; v1(5681,5584) 5674,5591 5656,5591 ; U2.22@5911.42,5718.9 5967.9,5718.9 v1(5996,5747) 5996,5839 6010,5853 6155.6,5853 R18.1@6202.6,5900 ; v1@5982.31,5747 cw(c5949.28,5747) 5972.64,5723.64 cw(c5996,5700.28) v1@5996,5733.31 ; v1@5986.32,5756.68 ccw(c5962.96,5780.04) 5996,5780.04 ccw(c6029.04,5780.04) v1@6005.68,5756.68 ; 6162.43,5859.84 cw(c6202.6,5819.67) R18.1@6202.6,5876.47 ; 6171.94,5869.34 ccw(c6145.22,5896.06) R18.1@6183.01,5896.06
  Top Layer w20: R17.2@6127.4,5800 R16.1@6202.6,5800 R18.1@6202.6,5900 ; R17.2@6138.43,5788.98 cw(c6165.04,5762.36) 6165.04,5800 cw(c6165.04,5837.64) R17.2@6138.43,5811.02 ; R16.1@6191.57,5788.98 ccw(c6164.96,5762.36) 6164.96,5800 ccw(c6164.96,5837.64) R16.1@6191.57,5811.02 ; R16.1@6191.57,5814.96 ccw(c6164.96,5841.58) 6202.6,5841.58 ccw(c6240.24,5841.58) R16.1@6213.62,5814.96 ; R18.1@6191.57,5885.04 cw(c6164.96,5858.42) 6202.6,5858.42 cw(c6240.24,5858.42) R18.1@6213.62,5885.04
  Bottom Layer w12: v1(5681,5584) 5792,5584 5955,5747 v1(5996,5747) ; v1@5690.68,5574.32 cw(c5714.04,5550.96) 5714.04,5584 cw(c5714.04,5617.04) v1@5690.68,5593.68 ; v1@5986.32,5737.32 ccw(c5962.96,5713.96) 5962.96,5747 ccw(c5962.96,5780.04) v1@5986.32,5756.68
SWIM_IN: R17.1 U2.21 U2.43 U2.46 | length 1225
  Top Layer w12: v1@5495.59,5610.2 cw(c5482.2,5593) 5504,5593 ; v1@5506.05,5634.53 ccw(c5509.03,5654.28) 5523.16,5640.16 ; v1@5512.41,5610.2 ccw(c5525.8,5593) 5504,5593 ; v1@5517.53,5623.05 cw(c5537.28,5626.03) 5523.16,5640.16 ; U2.46@5588.58,5581.1 5515.9,5581.1 5504,5593 ; U2.43@5588.58,5640.16 5523.16,5640.16 ; v1(5830,5694) 5835.21,5699.21 U2.21@5911.42,5699.21 6034.21,5699.21 6052.6,5717.6 R17.1@6052.6,5800 ; R17.1@6038.75,5782.21 cw(c6005.3,5748.77) 6052.6,5748.77 cw(c6099.89,5748.77) R17.1@6066.45,5782.21 ; 5504,5593 v1(5504,5621) 5523.16,5640.16
  Bottom Layer w12: v1(5504,5621) 5648,5621 5699.5,5672.5 5699.5,5716.5 5733,5750 5783,5750 5830,5703 v1(5830,5694) ; v1@5513.68,5611.32 cw(c5537.04,5587.96) 5537.04,5621 cw(c5537.04,5654.04) v1@5513.68,5630.68 ; 5800.27,5732.73 cw(c5761.55,5694) v1@5816.32,5694 ; 5820.76,5712.24 cw(c5802.52,5694) v1@5828.32,5694
SWIM_RST: R19.2 R20.1 U2.42 | length 2099.3
  Top Layer w12: v1@5496.31,5396 ccw(c5463.28,5396) 5486.64,5419.36 ccw(c5510,5442.72) v1@5510,5409.69 ; v1(5510,5396) 5486,5420 5486,5502 5464,5524 5464,5633 5490.84,5659.84 U2.42@5588.58,5659.84 ; v1@6072.3,5897.56 ccw(c6057.12,5916) 6081,5916 ; v1(6081,5887) 6081,5916 ; v1@6089.7,5897.56 cw(c6104.88,5916) 6081,5916 ; R19.2@6113.55,6082.21 cw(c6080.11,6048.77) 6127.4,6048.77 cw(c6174.7,6048.77) R19.2@6141.25,6082.21 ; R19.2@6127.4,6100 6127.4,5962.4 6081,5916
  Top Layer w30: R19.2@6127.4,6100 R20.1@6202.6,6100
  Bottom Layer w12: v1(5510,5396) 5513,5399 5728,5399 5790,5461 6123,5461 6177,5515 6177,5613 6130,5660 6130,5724 6113,5741 6113,5803.87 6081,5835.87 v1(6081,5887) ; v1@5519.68,5386.32 cw(c5550.28,5355.72) 5550.28,5399 ; v1@5519.68,5405.68 ccw(c5535.8,5421.8) 5535.8,5399 ; v1@6071.32,5877.32 cw(c6047.96,5853.96) 6081,5853.96 cw(c6114.04,5853.96) v1@6090.68,5877.32
SWIM_RST_IN: R19.1 U2.41 | length 2117.9
  Top Layer w12: v1(5420,5463) 5420,5472 5445,5497 ; v1@5433.6,5464.51 cw(c5473.1,5468.9) 5445,5497 ; U2.41@5588.58,5679.53 5475.53,5679.53 5445,5649 5445,5497 ; v1(6051,5947) 6046,5952 6040,5952 6043,5955 6062,5955 6097.69,5990.69 6097.69,6036.31 6052.6,6081.4 R19.1@6052.6,6100 ; v1@6051,5960.68 ccw(c6051,6000.97) 6079.48,5972.48 ; R19.1@6060.19,6096.06 ccw(c6113.91,6096.06) 6075.92,6058.08 ; v1@6064.68,5947 cw(c6090.48,5947) 6072.24,5965.24 ; R19.1@6072.19,6096.06 ccw(c6154.88,6096.06) 6096.41,6037.59
  Bottom Layer w12: v1(5420,5463) 5441,5442 ; v1@5421.07,5449.36 cw(c5423.05,5424.05) 5441,5442 ; v1@5433.64,5461.93 ccw(c5458.95,5459.95) 5441,5442 ; 6044,5897.06 cw(c6100.94,5897.06) v1@6060.68,5937.32 ; 6044,5926.03 cw(c6071.97,5926.03) v1@6052.19,5945.81 ; v1(6051,5947) 6044,5947 6044,5846 6094,5796 6094,5720 6107.69,5706.31 6107.69,5643.31 6150,5601 6150,5526 6111,5487 5774,5487 5729,5442 5441,5442
T_JTCK: R1.2 R6.2 SB1.2 U2.15 U2.26 | length 2641.9
  Top Layer w12: v1@5338.32,5474.68 ccw(c5314.96,5498.04) 5348,5498.04 ccw(c5381.04,5498.04) v1@5357.68,5474.68 ; SB1.2@5342.5,5494.5 cw(c5329.22,5481.22) 5348,5481.22 cw(c5366.78,5481.22) SB1.2@5353.5,5494.5 ; v1(5348,5465) SB1.2@5348,5500 ; v1(5546,5287) 5546.4,5287.4 R6.2@5600,5287.4 5600,5331 ; v1@5554.87,5297.42 ccw(c5567.02,5311.69) 5571.86,5293.59 ccw(c5576.95,5274.6) v1@5558.7,5281.91 ; v1@5555.68,5277.32 cw(c5580.01,5252.99) R6.2@5580.01,5287.4 ; v1@5555.68,5296.68 ccw(c5578.07,5319.07) R6.2@5578.07,5287.4 ; v1@5555.83,5277.48 cw(c5566.67,5267) 5570.57,5281.56 cw(c5575.15,5298.68) v1@5558.7,5292.09 ; R6.2@5582.21,5273.55 ccw(c5548.77,5240.11) 5548.77,5287.4 ccw(c5548.77,5334.7) R6.2@5582.21,5301.25 ; R6.2@5586.99,5302.05 ccw(c5561.29,5331) 5600,5331 ; R6.2@5613.01,5302.05 cw(c5638.71,5331) 5600,5331 ; v1@5747.91,5726.04 ccw(c5736.21,5742) 5756,5742 ; v1(5756,5715) 5756,5742 ; v1@5764.09,5726.04 cw(c5775.79,5742) 5756,5742 ; v1(5774,5628) 5822.04,5628 5868.15,5581.88 5910.64,5581.88 U2.15@5911.42,5581.1 5969.9,5581.1 5989,5562 5989,5462 5886,5359 5628,5359 5600,5331 ; v1@5783.68,5618.32 cw(c5807.04,5594.96) 5807.04,5628 cw(c5807.04,5661.04) v1@5783.68,5637.68 ; 5832.8,5761.8 ccw(c5818.62,5775.98) U2.26@5838.68,5775.98 ; U2.26@5838.49,5846.85 cw(c5859.66,5846.85) 5844.69,5861.82 ; 5864.11,5585.93 ccw(c5875.98,5597.8) U2.15@5875.98,5581.01 ; v1@5887.32,5867.32 ccw(c5863.96,5843.96) 5863.96,5877 ccw(c5863.96,5910.04) v1@5887.32,5886.68 ; v1(5897,5877) 5859.87,5877 5838.58,5855.71 U2.26@5838.58,5811.42 5838.58,5767.58 5826,5755 5769,5755 5756,5742
  Top Layer w20: R1.2@5287.4,5500 SB1.2@5348,5500 ; R1.2@5298.43,5488.98 cw(c5325.04,5462.36) 5325.04,5500 cw(c5325.04,5537.64) R1.2@5298.43,5511.02
  Bottom Layer w12: v1@5348,5451.31 cw(c5348,5369.99) 5405.5,5427.5 ; v1@5348,5463.32 cw(c5348,5410.96) 5385.02,5447.98 ; v1(5348,5465) 5368,5465 ; v1@5360.76,5460.04 cw(c5368,5457.23) 5368,5465 ; v1@5360.76,5469.96 ccw(c5368,5472.77) 5368,5465 ; v1@5532.31,5287 ccw(c5499.28,5287) 5522.64,5310.36 ccw(c5546,5333.72) v1@5546,5300.69 ; v1(5546,5287) 5368,5465 ; v1@5746.32,5705.32 cw(c5722.96,5681.96) 5756,5681.96 cw(c5789.04,5681.96) v1@5765.68,5705.32 ; v1@5748.92,5703.29 cw(c5736.26,5682.36) 5760.01,5688.21 ; 5756,5646.55 ccw(c5792.55,5646.55) v1@5766.71,5620.71 ; 5756,5675.52 ccw(c5821.52,5675.52) v1@5775.19,5629.19 ; v1@5756,5704.49 ccw(c5850.49,5704.49) v1@5783.68,5637.68 ; v1(5756,5715) 5756,5646 v1(5774,5628) ; 5762.91,5676.43 cw(c5803.32,5686.38) v1@5767.71,5707.92
T_JTMS: R2.2 R7.2 R15.2 SB2.2 U2.27 | length 2850
  Top Layer w12: R7.2@5800,5283.83 cw(c5830.64,5283.83) R7.2@5821.21,5312.98 ; R7.2@5800,5287.4 R7.2@5800,5312 ; R7.2@5800,5300.32 cw(c5825.31,5300.32) v1@5817.52,5324.4 ; v1@5803.55,5323.48 cw(c5790.9,5321.1) R7.2@5800,5312 ; v1@5810.87,5313.76 ccw(c5806.66,5305.34) R7.2@5800,5312 ; v1(5817,5326) 5817,5329 R7.2@5800,5312 ; U2.27@5818.9,5811.42 5818.9,5862.9 5850,5894 v1(5850,5911) ; v1(6022,5407) 6042,5427 ; v1@6023.58,5420.59 ccw(c6026.17,5442.83) 6042,5427 ; v1@6032.32,5520.32 cw(c6008.96,5496.96) 6042,5496.96 cw(c6075.04,5496.96) v1@6051.68,5520.32 ; v1@6035.59,5408.58 cw(c6057.83,5411.17) 6042,5427 ; v1(6042,5530) 6042,5427
  Top Layer w20: R2.2@5276.38,5614.96 ccw(c5249.76,5641.58) 5287.4,5641.58 ccw(c5325.04,5641.58) R2.2@5298.43,5614.96 ; R15.2@5276.98,5674.57 cw(c5251.81,5649.4) 5287.4,5649.4 ; 5287.4,5646.51 cw(c5327.08,5646.51) R15.2@5299.02,5674.57 ; R2.2@5298.43,5588.98 cw(c5325.04,5562.36) 5325.04,5600 cw(c5325.04,5637.64) R2.2@5298.43,5611.02 ; R15.2@5302.96,5674.57 cw(c5329.58,5647.96) 5329.58,5685.6 cw(c5329.58,5723.24) R15.2@5302.96,5696.62 ; R15.2@5310.65,5685.6 ccw(c5310.65,5710.35) v1@5328.15,5692.85 ; R15.2@5312.46,5681.01 cw(c5317.77,5661.19) v1@5329.48,5678.04 ; R15.2@5312.59,5685.6 cw(c5312.59,5663.59) v1@5328.15,5679.15 ; R15.2@5313.75,5689.84 ccw(c5317.95,5705.5) v1@5328.63,5693.29 ; R15.2@5314.52,5681.56 ccw(c5309.37,5700.8) v1@5326.61,5690.84 ; v1(5335,5686) 5334.6,5685.6 R15.2@5288,5685.6 5287.4,5685 R2.2@5287.4,5600 SB2.2@5348,5600
  Bottom Layer w12: v1@5321.33,5686.59 ccw(c5292.83,5687.83) 5313,5708 ; v1@5334.41,5699.67 cw(c5333.17,5728.17) 5313,5708 ; v1(5335,5686) 5313,5708 ; v1@5807.32,5335.68 ccw(c5783.96,5359.04) 5817,5359.04 ccw(c5850.04,5359.04) v1@5826.68,5335.68 ; v1(5817,5326) 5817,5417 5837,5437 5992,5437 v1(6022,5407) ; v1@5840.32,5901.32 cw(c5816.96,5877.96) 5850,5877.96 cw(c5883.04,5877.96) v1@5859.68,5901.32 ; v1(5850,5911) 5850,5890 ; v1@6008.31,5407 ccw(c5975.28,5407) 5998.64,5430.36 ccw(c6022,5453.72) v1@6022,5420.69 ; v1@6028.96,5525.86 ccw(c6011,5520.16) 6011,5539 ; v1(6042,5530) 6042,5533 6036,5539 6011,5539 ; 5313,5708 5313,5790 5362,5839 5799,5839 5850,5890 ; 5850,5890 ccw(c5840.73,5890) 5844.47,5898.48 cw(c5840.73,5890) 5850,5890 ; 5850,5890 cw(c5859.27,5890) 5855.53,5898.48 ccw(c5859.27,5890) 5850,5890 ; 5850,5890 5850,5866 5872.31,5843.69 5978.31,5843.69 6039,5783 6039,5710 5995,5666 5995,5555 6011,5539
T_NRST: R8.2 U2.18 | length 540.7
  Top Layer w12: R8.2@5886.15,5301.25 ccw(c5852.7,5334.7) 5900,5334.7 ccw(c5947.3,5334.7) R8.2@5913.85,5301.25 ; R8.2@5900,5287.4 5900,5346.13 6008,5454.13 6008,5593 5960.84,5640.16 U2.18@5911.42,5640.16
T_SWO: R11.2 U2.31 | length 1506.6
  Top Layer w12: U2.31@5740.16,5811.42 5740.16,5884.16 5803,5947 5894,5947 v1(5959,5882) ; v1@5945.31,5882 ccw(c5912.28,5882) 5935.64,5905.36 ccw(c5959,5928.72) v1@5959,5895.69 ; R11.2@5994.19,5306.11 ccw(c5991.74,5314) 6000,5314 ; R11.2@5999.53,5287.4 cw(c6062.6,5287.4) 6018,5332 ; R11.2@6000,5287.4 6000,5314 ; R11.2@6005.81,5306.11 cw(c6008.26,5314) 6000,5314 ; R11.2@6011.53,5287.4 cw(c6103.57,5287.4) 6038.49,5352.49 ; R11.2@6023.53,5287.4 cw(c6144.54,5287.4) 6058.97,5372.97 ; v1@6065.32,5670.32 cw(c6041.96,5646.96) 6075,5646.96 cw(c6108.04,5646.96) v1@6084.68,5670.32 ; v1(6075,5680) 6075,5389 6000,5314
  Bottom Layer w12: v1@5959,5868.31 cw(c5959,5799.06) 6007.97,5848.03 ; v1@5959,5880.32 cw(c5959,5840.03) 5987.48,5868.52 ; v1(5959,5882) 5974,5882 6075,5781 v1(6075,5680) ; v1@6065.32,5689.68 ccw(c6041.96,5713.04) 6075,5713.04 ccw(c6108.04,5713.04) v1@6084.68,5689.68
USB_DM: R10.2 U2.32 | length 353.1
  Top Layer w12: U2.32@5720.47,5811.42 5720.47,5901.47 5825,6006 R10.2@5825,6012.6 ; 5780.17,5961.17 ccw(c5728.74,6012.6) R10.2@5801.47,6012.6 ; 5800.66,5981.66 ccw(c5769.71,6012.6) R10.2@5813.47,6012.6 ; 5805.61,5986.6 cw(c5821.06,5971.15) R10.2@5821.06,5993.01
USB_DP: R12.2 U2.33 | length 294.2
  Top Layer w12: U2.33@5700.79,5811.42 5700.79,5916.79 5750,5966 ; R12.2@5736.29,5998.6 cw(c5704.38,5966) 5750,5966 ; R12.2@5750,6012.6 5750,5966 ; R12.2@5763.71,5998.6 ccw(c5795.62,5966) 5750,5966
V_TRG: P3.1 P4.1 pad.1@6350,5775 pad.1@6350,5800 pad.1@6350,5825 pad.1@6375,5775 pad.1@6375,5825 pad.1@6400,5775 pad.1@6400,5825 pad.1@6425,5775 pad.1@6425,5825 R3.2 R5.2 R16.2 | length 3157.1
  Top Layer w30: R5.2@5700,5287.4 5700,5292 v1(5734,5326) ; R5.2@5714.53,5287.4 cw(c5760.7,5287.4) v1@5728.05,5320.05 ; v1(6202,5329) 6202,5442 6172,5472 6172,5528 6277.4,5633.4 R16.2@6277.4,5800 pad.1@6350,5800 ; 6319.87,5793.57 ccw(c6331.31,5833.63) pad.1@6351.55,5797.21 ; 6319.87,5806.43 cw(c6331.31,5766.37) pad.1@6351.55,5802.79 ; pad.1@6344.75,5774.88 ccw(c6329.5,5794.08) pad.1@6353.06,5800.88 ; pad.1@6344.75,5825.12 cw(c6329.5,5805.92) pad.1@6353.06,5799.12 ; pad.1@6346.94,5799.12 cw(c6370.5,5805.92) pad.1@6355.25,5825.12 ; pad.1@6346.94,5800.88 ccw(c6370.5,5794.08) pad.1@6355.25,5774.88 ; pad.1@6347.75,5777.25 cw(c6402.66,5722.34) 6402.66,5800 cw(c6402.66,5877.66) pad.1@6347.75,5822.75 ; pad.1@6348.45,5797.21 ccw(c6368.69,5833.63) 6380.13,5793.57 ; pad.1@6348.45,5802.79 cw(c6368.69,5766.37) 6380.13,5806.43 ; pad.1@6352.25,5777.25 ccw(c6297.34,5722.34) 6297.34,5800 ccw(c6297.34,5877.66) pad.1@6352.25,5822.75 ; pad.1@6372.66,5777.17 cw(c6425,5728.6) P4.1@6425,5800 ; pad.1@6372.66,5822.83 ccw(c6425,5871.4) P4.1@6425,5800 ; pad.1@6378.16,5775.43 ccw(c6350,5771.58) pad.1@6350,5800 ; pad.1@6378.16,5824.57 cw(c6350,5828.42) pad.1@6350,5800 ; pad.1@6396.84,5775.43 cw(c6425,5771.58) P4.1@6425,5800 ; pad.1@6396.84,5824.57 ccw(c6425,5828.42) P4.1@6425,5800 ; pad.1@6402.34,5777.17 ccw(c6350,5728.6) pad.1@6350,5800 ; pad.1@6402.34,5822.83 cw(c6350,5871.4) pad.1@6350,5800 ; P4.1@6414.73,5789.73 ccw(c6389.93,5764.93) 6389.93,5800 ccw(c6389.93,5835.07) P4.1@6414.73,5810.27 ; pad.1@6427.25,5777.25 ccw(c6372.34,5722.34) 6372.34,5800 ccw(c6372.34,5877.66) pad.1@6427.25,5822.75 ; pad.1@6350,5800 P4.1@6425,5800
  Bottom Layer w30: P3.1@5489.73,5110.27 ccw(c5464.93,5135.07) 5500,5135.07 ccw(c5535.07,5135.07) P3.1@5510.27,5110.27 ; P3.1@5500,5100 5500,5153 5517,5170 5737,5170 ; v1(5734,5326) 5734,5173 5737,5170 ; v1(6202,5329) 6225,5329 6248,5306 ; v1@6202.12,5324.32 cw(c6203.73,5261.74) 6248,5306 ; 5737,5170 6033,5170 6088,5115 6226,5115 6248,5137 6248,5306
pads on no net: U1.4 U2.4 U2.11 U2.12 U2.13 U2.14 U2.16 U2.17 U2.19 U2.28 U2.29 U2.38 U2.39 U2.40
copper on no net: | length 2482.3
  Top Layer w10: 4730,5060 4750,5000 ; 4730,6440 4750,6500 ; 4740,5000 4760,5000 ; 4740,6500 4760,6500 ; 4750,5474.08 4750,5000 ; 4750,6025.92 4750,6500 ; 4770,5060 4750,5000 ; 4770,6440 4750,6500 ; 5000,6740 5000,6760 ; 5060,6730 5000,6750 ; 5060,6770 5000,6750 ; 5474.08,6750 5000,6750 ; 6025.92,6750 6500,6750 ; 6440,6730 6500,6750 ; 6440,6770 6500,6750 ; 6500,6740 6500,6760
  other v2: 5663.39,6322.57 5836.61,6322.57

## Polygon pours and split planes (outlines as drawn)
GND on Top Layer "Top Layer-No Net" (hatched 90Degree grid 20 track 8, pour order 4): 5000,6500 6500,6500 6500,5000 5000,5000
GND on Bottom Layer "Top Layer-No Net" (hatched 90Degree grid 20 track 8, pour order 3): 5000,6500 6500,6500 6500,5000 5000,5000

## Keep-outs
Keep-Out Layer:
  lines w10: 4995,5150 ccw(c5150,5150) 5150,4995 6350,4995 ccw(c6350,5150) 6505,5150 6505,6350 ccw(c6350,6350) 6350,6505 5150,6505 ccw(c5150,6350) 4995,6350 4995,5150

## Other copper
Top Layer:
  text "1500 (mil)" at 5484.08,6714.01 h60
  text "1500 (mil)" at 4785.99,5484.08 h60 r90

## Silkscreen, mask and mechanical layers (free items; w line width, h text height)
Top Overlay:
  text "ICViet.vn" at 5996.06,6440 h50
  text "GND" at 5232.28,6330.71 h40
  text "+5V" at 5228.35,6228.35 h40
  text "STLINK-V2" at 5996.06,6212.6 h50
  text "GND" at 5232.28,6129.92 h40
  text "." at 5495,5020 h60